# Allegro board CN0552 Allegro.brd
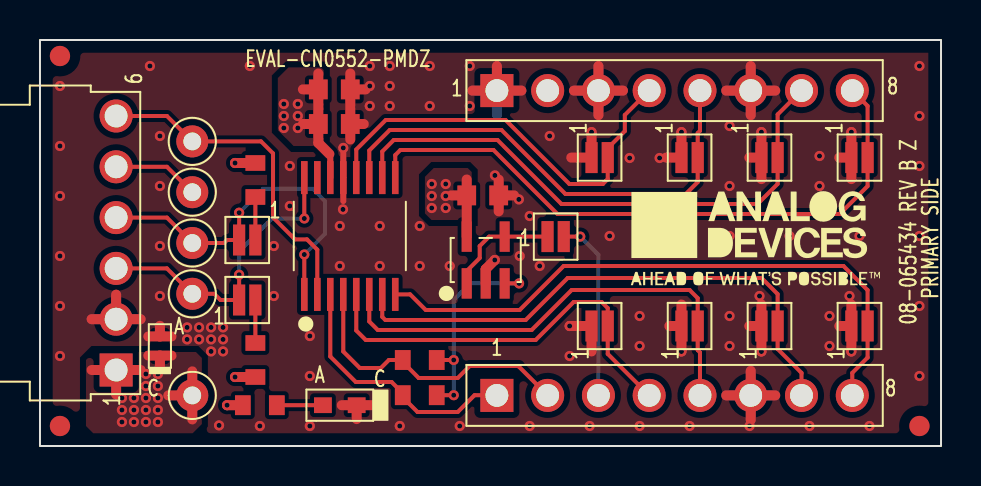
[diagram p0: board, top side]
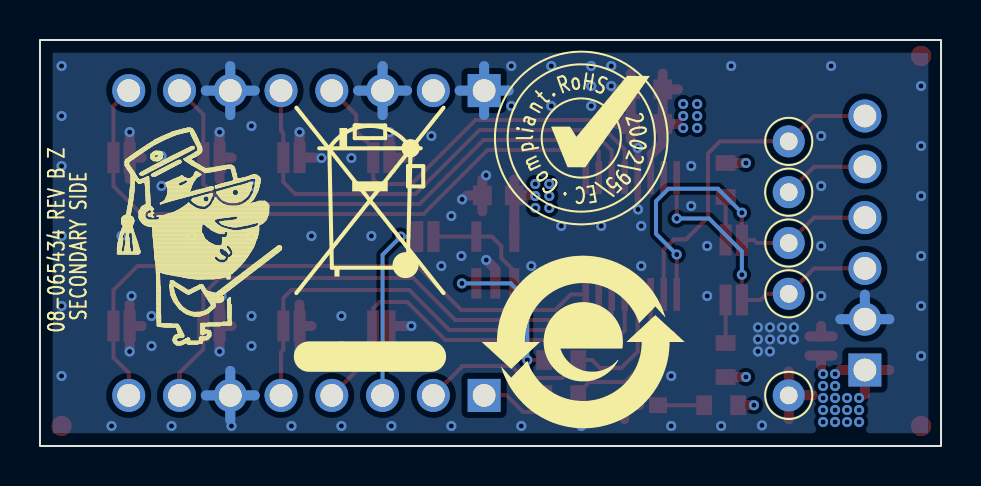
[diagram p1: board, bottom side, seen from below]

Outline 45.08 x 20.3 mm; copper layers: TOP, L2_GND, L3_PWR, BOTTOM. Coordinates in mm from the lower left corner of the outline.
Outline path: rectangle 0,0 45.08,20.3

## Design rules (mm)
constraint set DEFAULT: 

## Placement (name value [footprint] x y rotation side)
A1  AD8515ARTZ  [SOT23-5L]  22.3 9.3 0 top
C1  10uF  [C0603]  14.72 16.1 0 top
C2  0.1uF  [C0603]  14.72 17.83 0 top
C3  0.1uF  [C0603]  22.15 12.53 0 top
D1  ESD9L5.0ST5G  [SOD923]  6 5 90 top
DS1  SML-D12P8WT86  [LED0603_A]  15 2.04 180 top
INT  TP_VIA  [TPC63D35]  7.62 15.23 0 top
NOREF  -  [unnamed]  1 19.5 0 top
NOREF#2  -  [#2]  0 20.3 270 top
NOREF#3  -  [unnamed]  44 1 0 top
NOREF#4  -  [#2]  35.5 10.2 0 top
NOREF#5  -  [#2]  0 0 0 top
NOREF#6  -  [#2]  45.08 0 90 top
NOREF#7  -  [#2]  -58.64 215.64 0 top
NOREF#8  -  [#2]  45.08 0 0 top
NOREF#9  -  [unnamed]  1 1 0 top
NOREF#10  -  [#2]  -119.6 -155.2 0 top
NOREF#11  -  [#2]  -68.8 -12.96 0 top
NOREF#12  -  [#2]  -81.5 171.19 0 top
NOREF#13  -  [#2]  151.06 1.83 0 top
NOREF#14  -  [#2]  45.08 0 90 top
NOREF#15  -  [#2]  3.81 3.8 0 top
NOREF#16  -  [#2]  -119.6 -155.2 0 top
NOREF#17  -  [#2]  -119.6 -155.2 0 top
NOREF#18  -  [#2]  3.81 3.8 0 top
NOREF#19  -  [#2]  0 20.3 0 top
NOREF#20  -  [#2]  -119.6 -155.2 0 top
NOREF#21  -  [#2]  0 0 0 top
NOREF#22  -  [#2]  45.08 20.3 180 top
NOREF#23  -  [#2]  21.5 58 0 top
NOREF#24  -  [#2]  0 20.3 0 top
NOREF#25  -  [#2]  0 0 0 top
NOREF#26  -  [#2]  19.3 20.6 180 bottom
NOREF#27  -  [#2]  18 15.4 180 bottom
NOREF#28  -  [#2]  17.9 5.2 180 bottom
P1  -  [JPSLD02]  10.37 7.3 0 top
P2  TSW-106-09-T-S-RA  [CNTHMHDRRA1X6L600W100H124]  3.81 3.8 90 top
P3  -  [JPSLD02]  32.5 6 0 top
P4  -  [JPSLD02]  36.5 6 0 top
P5  -  [JPSLD02]  36.5 14.42 0 top
P6  -  [JPSLD02]  28 14.42 0 top
P7  -  [JPSLD02]  10.37 10.3 180 top
P8  PREC008SFAN-RC  [CNTHMHDR1X8L800W100H432]  22.86 2.53 0 top
P9  -  [JPSLD02]  28 6 0 top
P10  -  [JPSLD02]  41 6 0 top
P11  -  [JPSLD02]  41 14.42 0 top
P12  -  [JPSLD02]  32.5 14.42 0 top
P13  PREC008SFAN-RC  [CNTHMHDR1X8L800W100H432]  22.86 17.77 0 top
P14  -  [JPSLD02]  25.8 10.47 0 top
R1  100K  [R0603]  19 2.54 180 top
R2  118K  [R0603]  19 4.3 0 top
R3  1K  [R0603]  11 2.04 180 top
R14  10K  [R0603]  10.78 13.3 90 top
R15  10K  [R0603]  10.78 4.3 270 top
RST  TP_VIA  [TPC63D35]  7.62 12.69 0 top
SCL  TP_VIA  [TPC63D35]  7.62 10.15 0 top
SDA  TP_VIA  [TPC63D35]  7.62 7.61 0 top
U1  AD7746ARUZ  [TSSOP16]  15.5 10.5 0 top
VDD  TP_VIA  [TPC63D35]  7.62 2.53 0 top

## Library data of the parts
A1 = AD8515: User Part Number: UPN; Tolerance: N/A; alternate symbols: (); part number: AD8515_SM-AD8515ARTZ,E017419,SOT23-5L; tolerance: N/A
C1 = CAP: User Part Number: UPN; Tolerance: 10; alternate symbols: (); part number: CAP_SM-10UF,16V,10,E023048,C0603; tolerance: 10
C2 C3 = CAP: User Part Number: UPN; Tolerance: 10; alternate symbols: (); part number: CAP_SM-0.1UF,50V,10,E011865,C0603; tolerance: 10
D1 = DIOZNR: User Part Number: UPN; Tolerance: N/A; alternate symbols: (); part number: DIOZNR_SM-ESD9L5.0ST5G,5V,N/A,E012879,SOD923; tolerance: N/A
DS1 = DIOLED: User Part Number: UPN; Tolerance: N/A; alternate symbols: (); part number: DIOLED_SM-SML-D12P8WT86,2.2V,N/A,E027457,LED0603_A; tolerance: N/A
INT RST SCL SDA VDD = NCTESTPAD: Tolerance: N/A; User Part Number: UPN; alternate symbols: (); part number: NCTESTPAD_TH-TP_VIA,E012149,TPC63D35; tolerance: N/A
P1 P3-P7 P9-P12 P14 = NC2P: User Part Number: UPN; Tolerance: N/A; alternate symbols: (); part number: NC2P_SM-JPSLD02,E006230,JPSLD02; tolerance: N/A
P2 = CN6P: User Part Number: UPN; Tolerance: N/A; alternate symbols: (); part number: CN6P_TH-TSW-106-09-T-S-RA,E054517,CNTHMHDRRA1X6L600W100H124; tolerance: N/A
P8 P13 = CN8P_A: User Part Number: UPN; Tolerance: N/A; alternate symbols: (); part number: CN8P_A_TH-PREC008SFAN-RC,E033652,CNTHMHDR1X8L800W100H432; tolerance: N/A
R1 = RES: User Part Number: UPN; Tolerance: 1; alternate symbols: (R0603L); part number: RES_SM-100K,E010279,1/10W,1,R0603; tolerance: 1
R2 = RES: User Part Number: UPN; Tolerance: 1; alternate symbols: (R0603L); part number: RES_SM-118K,E020915,1/10W,1,R0603; tolerance: 1
R3 = RES: User Part Number: UPN; Tolerance: 1; alternate symbols: (R0603L); part number: RES_SM-1K,E003678,1/10W,1,R0603; tolerance: 1
R14 R15 = RES: User Part Number: UPN; Tolerance: 1; alternate symbols: (R0603L); part number: RES_SM-10K,E003671,1/10W,1,R0603; tolerance: 1
U1 = AD7746: Tolerance: N/A; User Part Number: UPN; alternate symbols: (); part number: AD7746_SM-AD7746ARUZ,E013073,TSSOP16; tolerance: N/A

## Footprints (pads in the part's own frame, mm; a bottom-side part is the same pattern mirrored in y, then rotated)
C0603
  rect 0.94x0.991 smd: 1(-0.8,0) 2(0.8,0)
CNTHMHDR1X8L800W100H432
  rect 1.651x1.651 hole 1.143: 1(0,0)
  round 1.651 hole 1.143: 2(2.54,0) 3(5.08,0) 4(7.62,0) 5(10.16,0) 6(12.7,0) 7(15.24,0) 8(17.78,0)
CNTHMHDRRA1X6L600W100H124
  rect 1.651x1.651 hole 1.143: 1(0,0)
  round 1.651 hole 1.143: 2(2.54,0) 3(5.08,0) 4(7.62,0) 5(10.16,0) 6(12.7,0)
JPSLD02
  rect 0.61x1.549 smd: 1(-0.406,0) 2(0.406,0)
LED0603_A
  rect 0.889x0.787 smd: A(0.844,0) C(-0.844,0)
R0603
  rect 0.787x0.991 smd: 1(-0.85,0) 2(0.85,0)
SOD923
  rect 0.457x0.559 smd: A(0.479,0) C(-0.479,0)
SOT23-5L
  rect 0.508x1.524 smd: 1(-0.95,-1.17) 2(0,-1.17) 3(0.95,-1.17) 4(0.95,1.17) 5(-0.95,1.17)
TPC63D35
  round 1.6 hole 0.889: 1(0,0)
TSSOP16
  rect 0.33x1.651 smd: 1(-2.275,-2.92) 2(-1.625,-2.92) 3(-0.975,-2.92) 4(-0.325,-2.92) 5(0.325,-2.92) 6(0.975,-2.92) 7(1.625,-2.92) 8(2.275,-2.92) 9(2.275,2.92) 10(1.625,2.92) 11(0.975,2.92) 12(0.325,2.92) 13(-0.325,2.92) 14(-0.975,2.92) 15(-1.625,2.92) 16(-2.275,2.92)
unnamed
  round 1.016 smd: (0,0)

## Nets
GND: A1.2(V-) C1.2(N2) C2.2(N2) C3.2(N2) D1.A(P) DS1.C P2.2 P3.1 P4.1 P5.1 P6.1 P8.6 P9.1 P10.1 P11.1 P12.1 P13.1 P13.3 P13.6 U1.13
VDD: A1.5 C1.1 C2.1 C3.1 D1.C P2.1 P13.2 R3.2(N2) R14.2(N2) R15.2(N2) U1.14 VDD.1(N1)
VIN_NEG: P6.2(N2) P13.4 U1.12(VIN(-))
VIN_POS: P12.2(N2) P13.5 U1.11
CIN1_NEG: P4.2(N2) P8.7 U1.7
CIN1_POS: P8.8(N8) P10.2(N2) U1.8
CIN2_NEG: P5.2(N2) P13.7 U1.10
CIN2_POS: P11.2(N2) P13.8(N8) U1.9
EXC_EXTENDED: P8.3 P14.2(N2)
EXCA: P8.1 R1.2(N2) U1.3
EXCB: P8.2 R2.1 U1.4
RDY: INT.1(N1) P2.6(N6) U1.2
REFIN_NEG: P3.2(N2) P8.5 U1.6
REFIN_POS: P8.4 P9.2(N2) U1.5
RST_I: P2.5 RST.1(N1)
SCL: P2.4 P7.2(N2) SCL.1(N1) U1.1
SDA: P1.1 P2.3 SDA.1(N1) U1.16
UNNAMED_2_AD8515_I25_: A1.1 A1.4 P14.1
UNNAMED_2_DIOLED_I6_P: DS1.A(P) R3.1
UNNAMED_2_NC2P_I36_N1: P7.1 R14.1
UNNAMED_2_NC2P_I39_N2: P1.2(N2) R15.1
UNNAMED_2_RES_I26_N1: A1.3 R1.1 R2.2(N2)

Pads without a net: U1 15

## Via types
v1: diameter 0.508, hole 0.254, TOP to BOTTOM, 140 vias

## Routing (per net, layer and track width the routed paths; a pad name or vN(x,y) marks a point on that pad's centre or on a via; arc(x,y) is an arc through that point)
GND: length 105.2
  TOP w0.3: 15.18,12.25 U1.13 v1(15.18,14.9)
  TOP w0.5: 39.99,6 P10.1 ; P10.1 40.59,7.07 ; P10.1 v1(40.59,4.73) ; 15.84,1.35 DS1.C ; DS1.C v1(16.84,2.04) ; DS1.C 15.1,2.04 ; 35.56,1.3 P8.6 ; P8.6 35.56,3.76 ; P8.6 36.79,2.53 ; P8.6 34.33,2.53 ; P4.1 v1(36.09,4.73) ; P4.1 36.09,7.07 ; P4.1 35.49,6 ; C1.2 16.2,16.1 ; C1.2 15.53,16.88 ; C1.2 15.53,15.32 ; v1(32.09,15.69) P12.1 31.32,14.42 ; P13.3 29.17,17.77 ; P13.3 27.94,19 ; P13.3 27.94,16.54 ; P13.3 26.71,17.77 ; 22.95,11.73 C3.2 ; C3.2 22.95,13.33 ; C3.2 23.72,12.53 ; 36.09,13.35 P5.1 ; P5.1 35.49,14.42 ; P5.1 v1(36.09,15.69) ; C2.2 15.53,18.63 ; C2.2 15.53,17.03 ; C2.2 16.3,17.83 ; A1.2 22.3,8.85 v1(22.75,9.3) ; 27.59,4.73 P9.1 v1(26.5,6) ; 5.42,5.48 6,5.48 ; 6,5.48 6.58,5.48 ; 6,5.48 6,6.01 ; 31.49,6 P3.1 ; P3.1 32.09,7.07 ; P3.1 v1(32.09,4.73) ; 21.63,17.77 P13.1 ; P13.1 24.09,17.77 ; P13.1 22.86,19 ; P2.2 3.81,7.57 ; P2.2 5.04,6.34 ; P2.2 2.58,6.34 ; 39.99,14.42 P11.1 ; P11.1 v1(40.59,15.69) ; P11.1 40.59,13.35 ; 26.58,14.42 P6.1 v1(27.59,15.69) ; P13.6 36.79,17.77 ; P13.6 34.33,17.77 ; P13.6 35.56,19 ; P13.6 35.56,16.54
  L2_GND w0.5: P13.6 35.56,19 ; P13.6 34.33,17.77 ; P13.6 36.79,17.77 ; P13.6 35.56,16.54 ; 34.33,2.53 P8.6 ; P8.6 35.56,3.76 ; P8.6 36.79,2.53 ; P8.6 35.56,1.3 ; P13.1 24.09,17.77 ; P13.1 22.86,19 ; P13.1 21.63,17.77 ; P13.1 22.86,16.54 ; P2.2 5.04,6.34 ; P2.2 2.58,6.34 ; P2.2 3.81,7.57 ; P13.3 29.17,17.77 ; P13.3 27.94,16.54 ; P13.3 26.71,17.77 ; P13.3 27.94,19
  BOTTOM w0.5: P13.3 29.17,17.77 ; P13.3 26.71,17.77 ; P13.3 27.94,16.54 ; P13.3 27.94,19 ; 22.86,16.54 P13.1 ; P13.1 21.63,17.77 ; P13.1 24.09,17.77 ; P13.1 22.86,19 ; P13.6 35.56,19 ; P13.6 36.79,17.77 ; P13.6 34.33,17.77 ; P13.6 35.56,16.54 ; P2.2 3.81,7.57 ; P2.2 2.58,6.34 ; P2.2 5.04,6.34 ; P8.6 36.79,2.53 ; P8.6 35.56,1.3 ; P8.6 34.33,2.53 ; P8.6 35.56,3.76
  vias: v1(1,18) v1(1,15) v1(1,12.5) v1(1,9.5) v1(1,7) v1(1,4.5) v1(5.5,19) v1(6,15.5) v1(6,13) v1(6,10) v1(6,7.5) v1(7.36,5.93) v1(7.36,5.33) v1(7.96,5.93) v1(7.96,5.33) v1(8.56,5.93) v1(8.56,5.33) v1(8.56,4.73) v1(8.96,1.03) v1(9.16,5.93) v1(9.16,5.33) v1(9.16,4.73) v1(10.5,19) v1(11,1) v1(11.7,10) v1(11.7,7.5) v1(12.5,14) v1(12.5,12) v1(13.5,5.5) v1(13.5,3.5) v1(13.5,1) v1(15,11) v1(15,9) v1(15.16,11.83) v1(16.5,19) v1(16.5,18) v1(16.5,17) v1(17,11) v1(17,9) v1(17.5,19) v1(17.5,18) v1(17.5,17) v1(18,1) v1(19,11) v1(19,9) v1(19.5,19) v1(19.5,17) v1(20.5,9) v1(21,1) v1(21.5,19) v1(21.5,17) v1(22.76,13.53) v1(23.96,12.33) v1(24,9.5) v1(24.5,11.5) v1(24.5,1) v1(25,9) v1(25.5,15.5) v1(26.5,4.5) v1(27.5,1) v1(28.5,10.5) v1(29.5,14.4) v1(30,6.5) v1(30,5) v1(30,1) v1(31,14.4) v1(31.5,10.5) v1(32.5,1) v1(34.5,16) v1(34.5,13) v1(34.5,10.5) v1(34.5,6.5) v1(34.5,5) v1(35.5,1) v1(36,7.5) v1(37.5,10.5) v1(38.5,1) v1(39,14.5) v1(39,13) v1(39.5,6.5) v1(39.5,5) v1(40.5,7.5) v1(41,10.5) v1(41.5,1) v1(44,19) v1(44,16.5) v1(44,14) v1(44,10.5) v1(44,7) v1(44,3.5)
VDD: length 36.9
  TOP w0.3: 14.48,14.6 14.53,14.55 U1.14
  TOP w0.5: R3.2 v1(9.36,2.04) ; P2.1 5.04,3.8 ; P2.1 3.81,2.57 ; P2.1 2.58,3.8 ; 7.62,1.33 VDD.1 ; VDD.1 7.62,3.73 ; VDD.1 6.42,2.53 ; 13.93,17.03 13.93,17.83 ; 13.93,17.83 13.93,18.63 ; 13.93,17.83 13.15,17.83 ; 13.15,16.1 13.93,16.1 ; 13.93,16.1 13.93,15.15 14.48,14.6 ; 13.93,16.1 13.93,16.9 ; R15.2 v1(9.76,3.45) ; R14.2 v1(9.76,14.15) ; 6,3.99 D1.C ; D1.C 6.58,4.52 ; D1.C 5.42,4.52 ; 20.58,12.53 C3.1 ; C3.1 A1.5 ; C3.1 21.35,13.33
  L3_PWR w0.5: P13.2 25.4,19 ; P13.2 26.63,17.77 ; P13.2 25.4,16.54 ; P13.2 24.17,17.77 ; VDD.1 7.62,3.73 ; VDD.1 6.42,2.53 ; VDD.1 7.62,1.33 ; VDD.1 8.82,2.53 ; 3.81,2.57 P2.1 ; P2.1 5.04,3.8 ; P2.1 3.81,5.03 ; P2.1 2.58,3.8
  vias: v1(4.1,2.4) v1(4.1,1.8) v1(4.1,1.2) v1(4.7,2.4) v1(4.7,1.8) v1(4.7,1.2) v1(5.3,3.6) v1(5.3,3) v1(5.3,2.4) v1(5.3,1.8) v1(5.3,1.2) v1(5.9,3.6) v1(5.9,3) v1(5.9,2.4) v1(5.9,1.8) v1(5.9,1.2) v1(12.2,17.1) v1(12.2,16.5) v1(12.2,15.9) v1(12.9,17.1) v1(12.9,16.5) v1(12.9,15.9) v1(19.6,13.1) v1(19.6,12.5) v1(19.6,11.9) v1(20.3,13.1) v1(20.3,12.5) v1(20.3,11.9)
VIN_NEG: length 21.3
  TOP w0.2: P13.4 29.26,16.55 29.26,15.74 28.41,14.89 P6.2 28.41,13.35 28.16,13.1 26.49,13.1 23.29,16.3 17.3,16.3 15.83,14.83 15.83,13.42
VIN_POS: length 24.4
  TOP w0.2: P13.5 33.02,15.76 32.91,15.64 P12.2 32.91,13.2 32.31,12.6 26.29,12.6 23.09,15.8 17.5,15.8 16.47,14.77 U1.11
CIN1_NEG: length 27.7
  TOP w0.2: U1.7 17.12,6.45 17.28,6.3 24.3,6.3 26.4,8.4 36.1,8.4 36.91,7.59 P4.2 36.91,4.85 38.1,3.66 P8.7
CIN1_POS: length 30.9
  TOP w0.2: P8.8 40.64,3.66 41.41,4.42 P10.2 41.41,7.79 40.2,9 26.2,9 24,6.8 19.3,6.8 18.52,7.58 U1.8
CIN2_NEG: length 28.2
  TOP w0.2: U1.10 17.12,14.72 17.7,15.3 22.89,15.3 26.09,12.1 35.9,12.1 36.91,13.11 P5.2 36.91,16.58 P13.7
CIN2_POS: length 31.9
  TOP w0.2: P13.8 41.41,17 P11.2 41.41,12.99 40.01,11.6 25.89,11.6 22.69,14.8 18.03,14.8 17.77,14.55 U1.9
EXC_EXTENDED: length 9.1
  TOP w0.2: P14.2 v1(27.03,10.47)
  BOTTOM w0.2: P8.3 27.94,9.56 v1(27.03,10.47)
EXCA: length 13.1
  TOP w0.2: P8.1 22.85,2.54 21.74,2.54 20.9,1.7 18.89,1.7 18.15,2.44 R1.2 18.15,2.64 17.59,3.2 15.8,3.2 14.53,4.47 U1.3
EXCB: length 14.9
  TOP w0.2: P8.2 23.96,3.97 23.96,4 21.5,4 20.9,3.4 18.95,3.4 18.15,4.2 R2.1 17.46,4.3 17.06,3.9 16,3.9 15.18,4.72 U1.4
RDY: length 16.9
  TOP w0.2: P2.6 6.35,16.5 INT.1 11.06,15.23 11.66,14.63 11.66,11.43 12.76,10.33 13.36,10.33 13.88,9.81 U1.2
REFIN_NEG: length 23.9
  TOP w0.2: P8.5 33.02,4.68 32.91,4.79 P3.2 32.91,7.39 32.5,7.8 26.6,7.8 24.6,5.8 16.9,5.8 16.47,6.22 U1.6
REFIN_POS: length 20.7
  TOP w0.2: P8.4 28.41,4.6 P9.2 28.41,6.89 28.1,7.2 26.7,7.2 24.8,5.3 16.3,5.3 15.83,5.78 15.83,7.58
RST_I: length 4.3
  TOP w0.2: P2.5 6.35,13.96 RST.1
SCL: length 18.2
  TOP w0.2: U1.1 v1(13.22,9.57) ; v1(9.96,11.66) P7.2 9.36,10.3 9.21,10.15 SCL.1 6.35,11.42 P2.4
  BOTTOM w0.2: v1(13.22,9.57) 14.26,10.61 14.26,12.24 13.64,12.86 11.16,12.86 v1(9.96,11.66)
SDA: length 15.2
  TOP w0.2: U1.16 v1(13.22,11.38) ; v1(9.96,8.56) P1.1 9.03,7.3 8.72,7.61 SDA.1 6.35,8.88 P2.3
  BOTTOM w0.2: v1(13.22,11.38) 11.61,11.38 9.96,9.73 v1(9.96,8.56)
UNNAMED_2_AD8515_I25_: length 5.7
  TOP w0.2: A1.1 21.35,8.75 22,9.4 22,10 22.47,10.47 A1.4 P14.1
UNNAMED_2_DIOLED_I6_P: length 2.3
  TOP w0.2: R3.1 DS1.A
UNNAMED_2_NC2P_I36_N1: length 2.2
  TOP w0.2: P7.1 R14.1
UNNAMED_2_NC2P_I39_N2: length 2.1
  TOP w0.2: P1.2 R15.1
UNNAMED_2_RES_I26_N1: length 10.8
  TOP w0.2: R2.2 v1(20.7,4.3) ; R1.1 v1(20.7,2.54) ; A1.3 v1(23.97,8.13)
  BOTTOM w0.2: v1(20.7,2.54) v1(20.7,4.3) 20.7,7.3 21.53,8.13 v1(23.97,8.13)

## Copper pours and planes (outline as drawn; the poured copper is in the pictures)
GND on TOP: 0.64,19.66 44.44,19.66 44.44,0.64 0.64,0.64 ; 4 cut-outs
GND on BOTTOM, L2_GND: 0.64,19.66 44.44,19.66 44.44,0.64 0.64,0.64
VDD on TOP: 2.7,4.7 7.8,4.7 8.1,4.4 8.1,1.1 7.64,0.64 2.66,0.64 2.3,1 2.3,4.3
VDD on TOP: 21.6,11.3 21.6,13.7 21.4,13.9 19.7,13.9 19.26,13.46 19.26,11.63 19.59,11.3
VDD on TOP: 14.2,14.6 13.8,15 12.69,15 11.9,15.79 11.9,18.4 12.43,18.93 14.06,18.93 14.2,18.79
VDD on L3_PWR: 0.64,19.66 44.44,19.66 44.44,0.64 0.64,0.64

## Text on the board
Ref Des/Silkscreen Bottom: SECONDARY SIDE | 08-065434 REV B Z
User.Comments: 5.    ASSEMBLY VENDOR MUST SOLDER SHORT ON DEFAULT POSITION PIN 1 & 2 OF COMPONENT | 6.    ASSEMBLED BOARDS TO BE SHIPPED SINGULATED. | 7.    SMOOTHEN EDGES AND FREE FROM BURS AFTER DEPANIZATION. | P7, P1 & P14.
Ref Des/Silkscreen Top: C | A | EVAL-CN0552-PMDZ | 8 | 08-065434 REV B Z | PRIMARY SIDE
PAGE_OUTLINE: 15AUG20 | B | CHANGES PER ECR-103897 | 03AUG21 | Z. ARCEO | CUSTOMER EVALUATION Z
DIMENSION: " | (REF) | DIA MAX
User.11: A | C
User.15: 15.    BOARDS TO BE SHIPPED IN ARRAYS. | 16.    PANEL TO BE SUBJECTED TO CUSTOMER'S APPROVAL. | 17.    PANELED SOLDER PASTE STENCIL SHOULD BE SENT TO THE CUSTOMER.
User.22: 08-      -07 | L2 GND
User.23: 08-      -08 | L3 PWR
User.45: FIGURE | SIZE | 0.254 | 0.889 | 1.143 | PLATED | DRILL CHART: TOP to BOTTOM | ALL UNITS ARE IN MILLIMETERS | QTY | 140 | 5 | 22 | TOLERANCE/NOTES
